# Altium PCB DISPLAY PANEL V2.PcbDoc
Units mm, origin at the board's own origin, x right, y up, seen from the top; angles counter-clockwise.
Board outline 80 x 49 mm, 2 copper layers (Top Layer, Bottom Layer); 4 components, 0 nets, 8 pads, 0 vias.
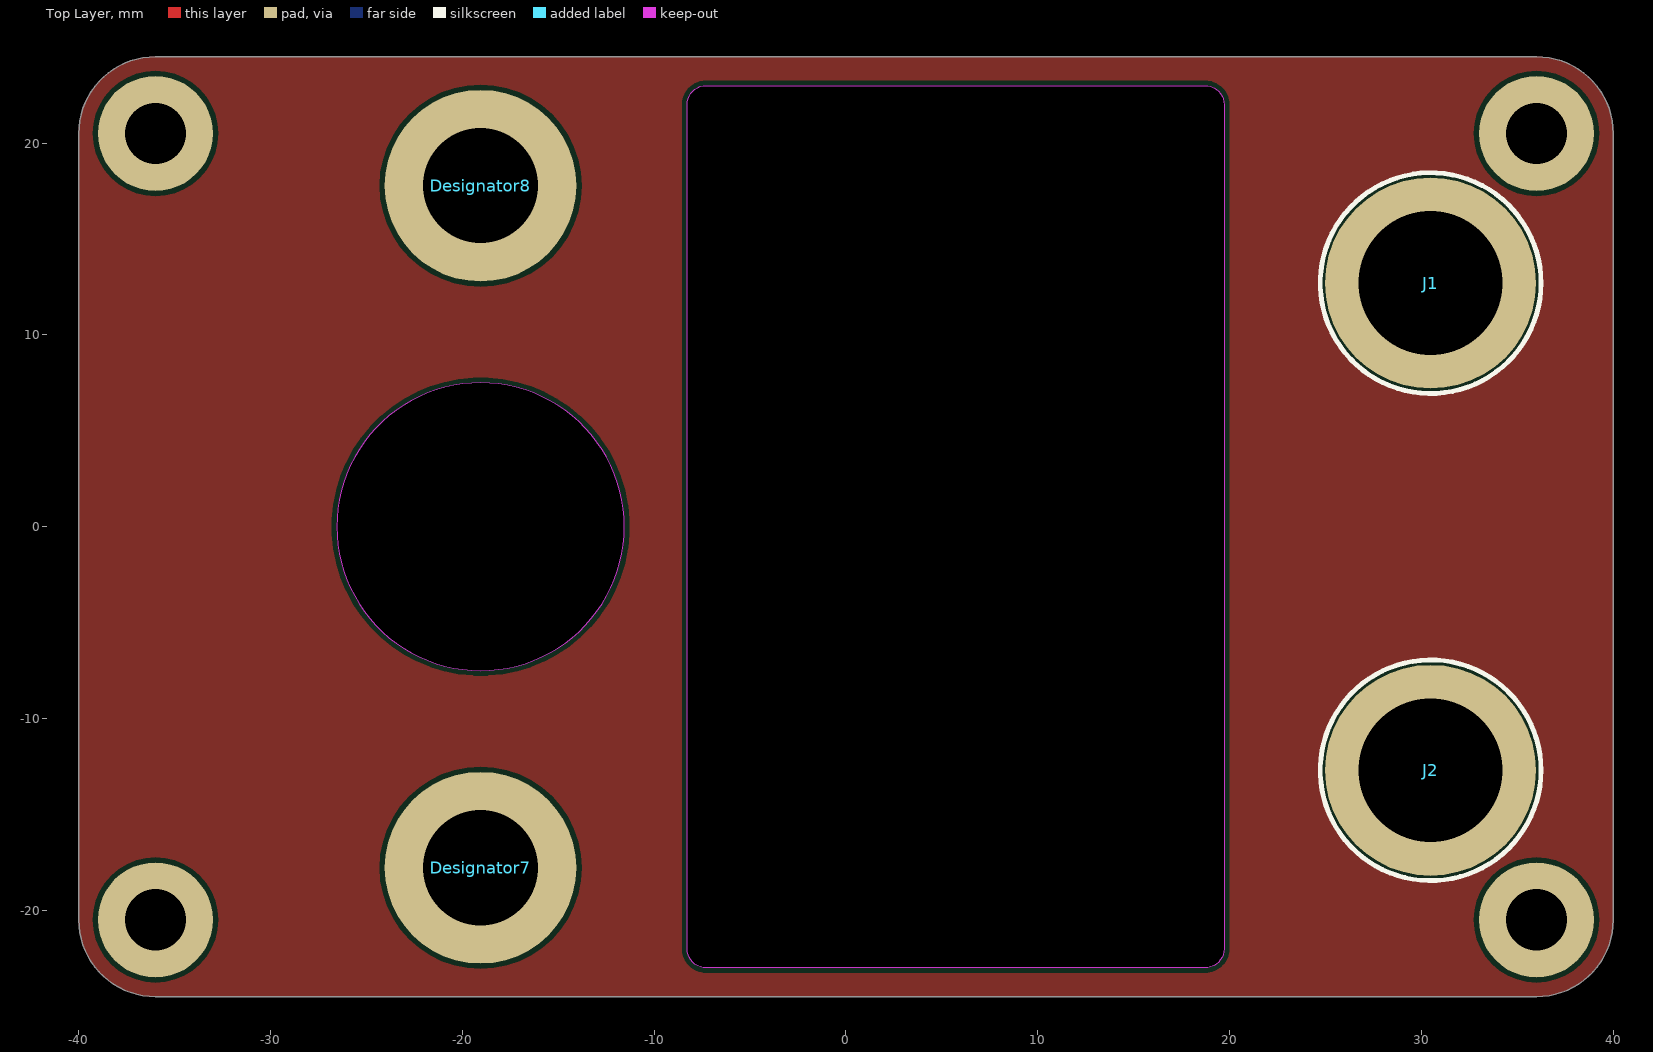
[diagram p0: Top Layer view]
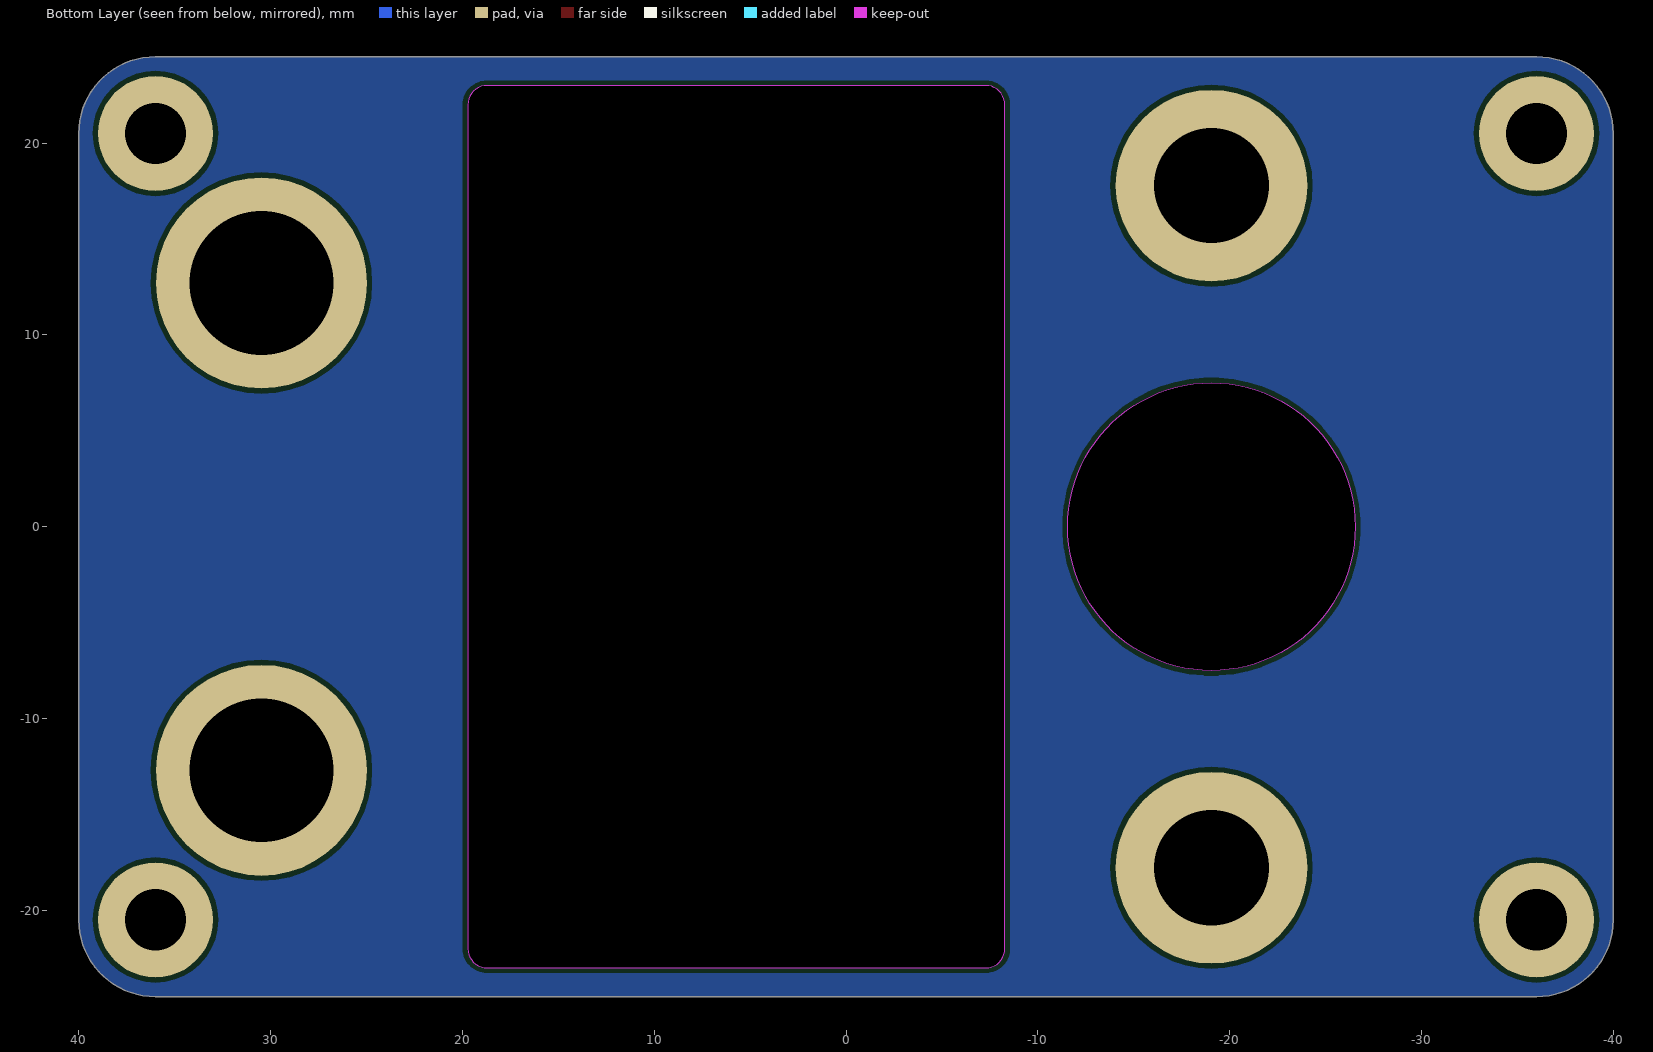
[diagram p1: Bottom Layer view, seen from below]

## Layer stack, top to bottom
Top Solder: solder mask 0.0102, Solder Resist, Dk 3.5
Top Layer: signal copper 0.0356
Dielectric1: dielectric 0.32, FR-4, Dk 4.8
Bottom Layer: signal copper 0.0356
Bottom Solder: solder mask 0.0102, Solder Resist, Dk 3.5

## Board outline
-40,-20.5 -40,20.5 cw(c-36,20.5) -36,24.5 36,24.5 cw(c36,20.5) 40,20.5 40,-20.5 cw(c36,-20.5) 36,-24.5 -36,-24.5 cw(c-36,-20.5)
cut-out: -8.285,-22 -8.285,22 cw(c-7.285,22) -7.285,23 18.715,23 cw(c18.715,22) 19.715,22 19.715,-22 cw(c18.715,-22) 18.715,-23 -7.285,-23 cw(c-7.285,-22)
cut-out: -26.55,0 ccw(c-19.05,0) -19.05,-7.5 ccw(c-19.05,0) -11.55,0 ccw(c-19.05,0) -19.05,7.5 ccw(c-19.05,0)

## Design rules (kind name [scope] priority, off if disabled: settings)
Clearance [All] p1: gap=0.254 ignorepadtopadclearanceinfootprint=FALSE except(0: Arc-Hole Track-Hole SMDPad-Hole THPad-Hole Via-Hole Fill-Hole Poly-Hole Region-Hole Text-Hole)
PolygonConnect [All] p1: connectstyle=Relief reliefconductorwidth=0.254 reliefentries=4 polygonreliefangle="90 Angle" airgapwidth=0.254
RoutingVias [All] p1: holewidth=0.711 width=1.27 viastyle="Through Hole" minholewidth=0.711 minwidth=1.27 maxholewidth=0.711 maxwidth=1.27
SolderMaskExpansion [All] p1: expansion=0.102
Width [All] p1: maxlimit=0.254 minlimit=0.254 preferedwidth=0.254
30 further rules are at their usual default settings.

## Components (designator, comment, footprint, x,y, rotation, side; value= is the part's Value field where it differs from the comment)
Designator7 "Comment" "SPDT MINI TOGGLE" -19.05,-17.78 r180 top
Designator8 "Comment" "SPDT MINI TOGGLE" -19.05,17.78 r0 top
J1 "Socket" "BANANA SOCKET 4MM PCB MOUNT" 30.48,12.7 r225 top
J2 "Socket" "BANANA SOCKET 4MM PCB MOUNT" 30.48,-12.7 r315 top

## Footprints (in the part's own frame and the unit in brackets; to place one, negate y for a bottom-side part, rotate by r counter-clockwise, add the part's x,y. Pads: shape width x height; smd on the part's side, far side on the other; paste and mask are expansions set on the pad)
"BANANA SOCKET 4MM PCB MOUNT" [mm]
  round 11 hole 7.5: MOUNT(0,0)
  silkscreen extent -5.76,-5.75 5.75,5.76, body extent -5.5,-13.6 5.5,5.49, height 7.52
"SPDT MINI TOGGLE" [mm]
  round 10 hole 6: MOUNT(0,0)

## Free pads (board coordinates)
  round 6 hole 3.2: 0(-36,-20.5) 0(-36,20.5) 0(36,-20.5) 0(36,20.5)

## Nets (pads, with @x,y where several pads share a name; then routed paths per layer and width w, separated by ;. In a path a pad name is that pad's centre, name@x,y a point inside that pad or via, vN(x,y) a via of type N, cw(c..) or ccw(c..) an arc to the next point about the centre after c; other vN are vias at no path point)
pads on no net: Designator7.MOUNT Designator8.MOUNT J1.MOUNT J2.MOUNT

## Polygon pours and split planes (outlines as drawn)
no net on Top Layer "TOP" (solid, pour order 0): -40,-20.5 -40,20.5 cw(c-36,20.5) -36,24.5 36,24.5 cw(c36,20.5) 40,20.5 40,-20.5 cw(c36,-20.5) 36,-24.5 -36,-24.5 cw(c-36,-20.5)
no net on Bottom Layer "BOTTOM" (solid, pour order 1): -40,-20.5 -40,20.5 cw(c-36,20.5) -36,24.5 36,24.5 cw(c36,20.5) 40,20.5 40,-20.5 cw(c36,-20.5) 36,-24.5 -36,-24.5 cw(c-36,-20.5)

## Silkscreen, mask and mechanical layers (free items; w line width, h text height)
Top Solder:
  text "HIGH" at -12.065,22.225 h4 r270
  text "LOW" at -28.575,21.844 h4 r270
  text "Amps" at 22.225,9.525 h6.5 r270
  text "SENSE" at -12.7,-11.938 h4 r270
  text "SET" at -28.575,-14.605 h4 r270
Mechanical 1:
  circle w0.254: c-19.05,0 r7.5
  lines w0.254: -40,-20.5 ccw(c-36,-20.5) -36,-24.5 36,-24.5 ccw(c36,-20.5) 40,-20.5 40,20.5 ccw(c36,20.5) 36,24.5 -36,24.5 ccw(c-36,20.5) -40,20.5 -40,-20.5 ; -8.285,-22 ccw(c-7.285,-22) -7.285,-23 5.715,-23 18.715,-23 ccw(c18.715,-22) 19.715,-22 19.715,0 19.715,22 ccw(c18.715,22) 18.715,23 5.715,23 -7.285,23 ccw(c-7.285,22) -8.285,22 -8.285,0 -8.285,-22
Mechanical 3:
  lines w0.254: -5.715,-17.78 -19.05,-17.78 -19.05,17.78 -5.715,17.78 ; 30.48,-12.7 30.48,12.7